# Altium PCB PCB1.PcbDoc
Units mil, origin at the board's own origin, x right, y up, seen from the top; angles counter-clockwise.
Board outline 1545 x 620 mil, 2 copper layers (Top Layer, Bottom Layer); 4 components, 4 nets, 12 pads, 0 vias.
Unrouted connection lines stored in the file: 8.
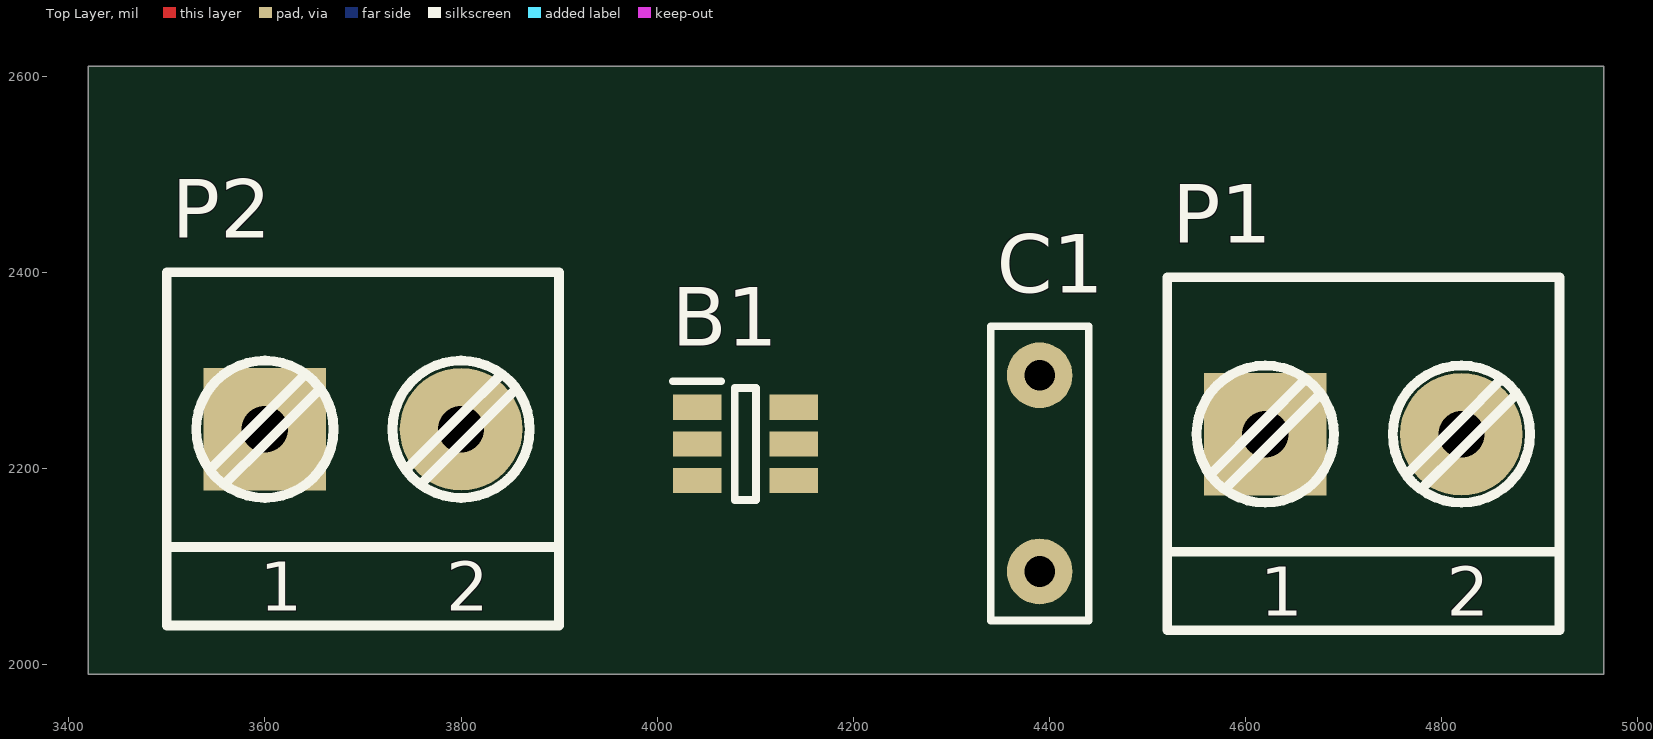
[diagram p0: Top Layer view]
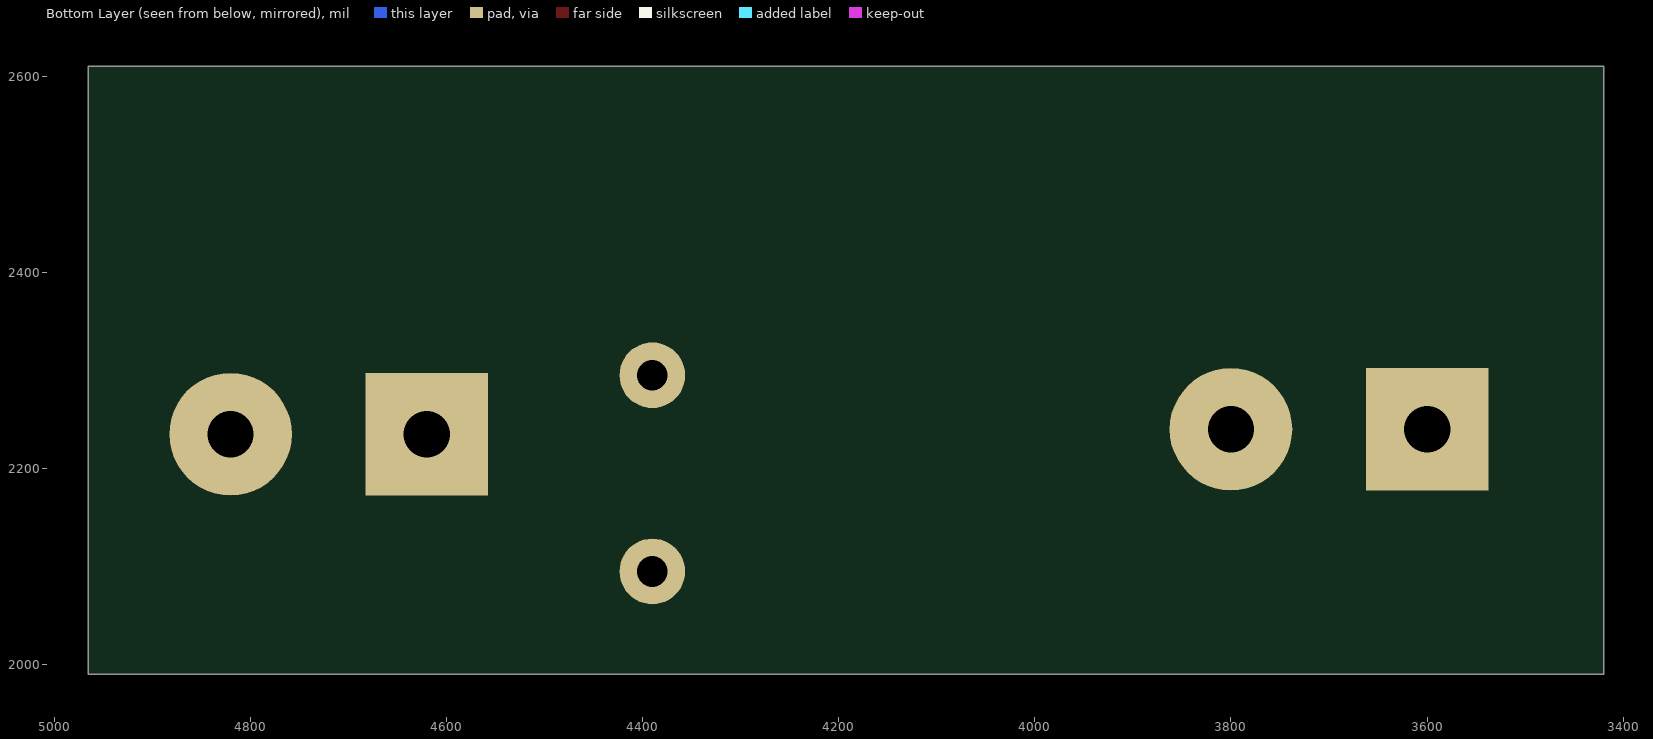
[diagram p1: Bottom Layer view, seen from below]

## Layer stack, top to bottom
Top Solder: solder mask 0.4, Solder Resist, Dk 3.5
Top Layer: signal copper 1.4
Dielectric 1: dielectric 12.6, FR-4, Dk 4.8
Bottom Layer: signal copper 1.4
Bottom Solder: solder mask 0.4, Solder Resist, Dk 3.5

## Board outline
3420,1990 4965,1990 4965,2610 3420,2610

## Design rules (kind name [scope] priority, off if disabled: settings)
Clearance [All] p1: gap=10 ignorepadtopadclearanceinfootprint=FALSE except(0: Arc-Hole Track-Hole SMDPad-Hole THPad-Hole Via-Hole Fill-Hole Poly-Hole Region-Hole Text-Hole)
PolygonConnect [All] p1: connectstyle=Relief reliefconductorwidth=10 reliefentries=4 polygonreliefangle="90 Angle" airgapwidth=10
RoutingVias [All] p1: holewidth=28 width=50 viastyle="Through Hole" minholewidth=28 minwidth=50 maxholewidth=28 maxwidth=50
SolderMaskExpansion [All] p1: expansion=4 istentingtop=FALSE
Width [All] p1: maxlimit=10 minlimit=10 preferedwidth=10
30 further rules are at their usual default settings.

## Components (designator, comment, footprint, x,y, rotation, side; value= is the part's Value field where it differs from the comment)
B1 "CT100LW-FS6" SOT95P280X135-6N 4090,2225 r0 top
C1 "0.1 uF" ece-RAD0.2 4390,2295 r270 top
P1 "Connector2way" ece-TER-2.02 4620,2235 r90 top
P2 "Connector2way" ece-TER-2.02 3600,2240 r90 top

## Footprints (in the part's own frame and the unit in brackets; to place one, negate y for a bottom-side part, rotate by r counter-clockwise, add the part's x,y. Pads: shape width x height; smd on the part's side, far side on the other; paste and mask are expansions set on the pad)
ece-RAD0.2 [mm]
  round 1.7 hole 0.8: 1(0,0) 2(5.08,0)
  silkscreen extent -1.27,-1.27 6.35,1.27
ece-TER-2.02 [mm]
  rect 3.175x3.175 hole 1.2: 1(0,0)
  round 3.175 hole 1.2: 2(0,-5.08)
  silkscreen extent -5.08,-7.62 4.06,2.54
SOT95P280X135-6N [mm]
  rect 1.25x0.65 smd: 1(-1.25,0.95) 2(-1.25,0) 3(-1.25,-0.95) 4(1.25,-0.95) 5(1.25,0) 6(1.25,0.95)
  silkscreen extent -1.88,-1.45 0.28,1.63

## Part data
B1: "Board Mount Hall Effect / Magnetic Sensors Differential TMR High Sensitivity Magnetic 1D Linear  Sensor ,SOT23 - 6 pin Package, F-Temp", Manufacturer_Name="Allegro Microsystems", Geometry.Height=1.35mm, Manufacturer_Part_Number=CT100LW-FS6
C1: library part CAP, "Capacitor Non Polarised Through Hole"
P1 P2: "2 way screw connector"

## Nets (pads, with @x,y where several pads share a name; then routed paths per layer and width w, separated by ;. In a path a pad name is that pad's centre, name@x,y a point inside that pad or via, vN(x,y) a via of type N, cw(c..) or ccw(c..) an arc to the next point about the centre after c; other vN are vias at no path point)
GND: B1.2 B1.4 B1.5 C1.2 P1.2
VDD: B1.6 C1.1 P1.1
X1: B1.3 P2.1
X2: B1.1 P2.2

## Text inside footprints (layer, text, board x,y; h text height)
P1: Top Overlay "2" at 4805,2050 h50; Top Overlay "1" at 4615,2050 h50
P2: Top Overlay "2" at 3785,2055 h50; Top Overlay "1" at 3595,2055 h50